# EAGLE board board (EAGLE 9.7.0)
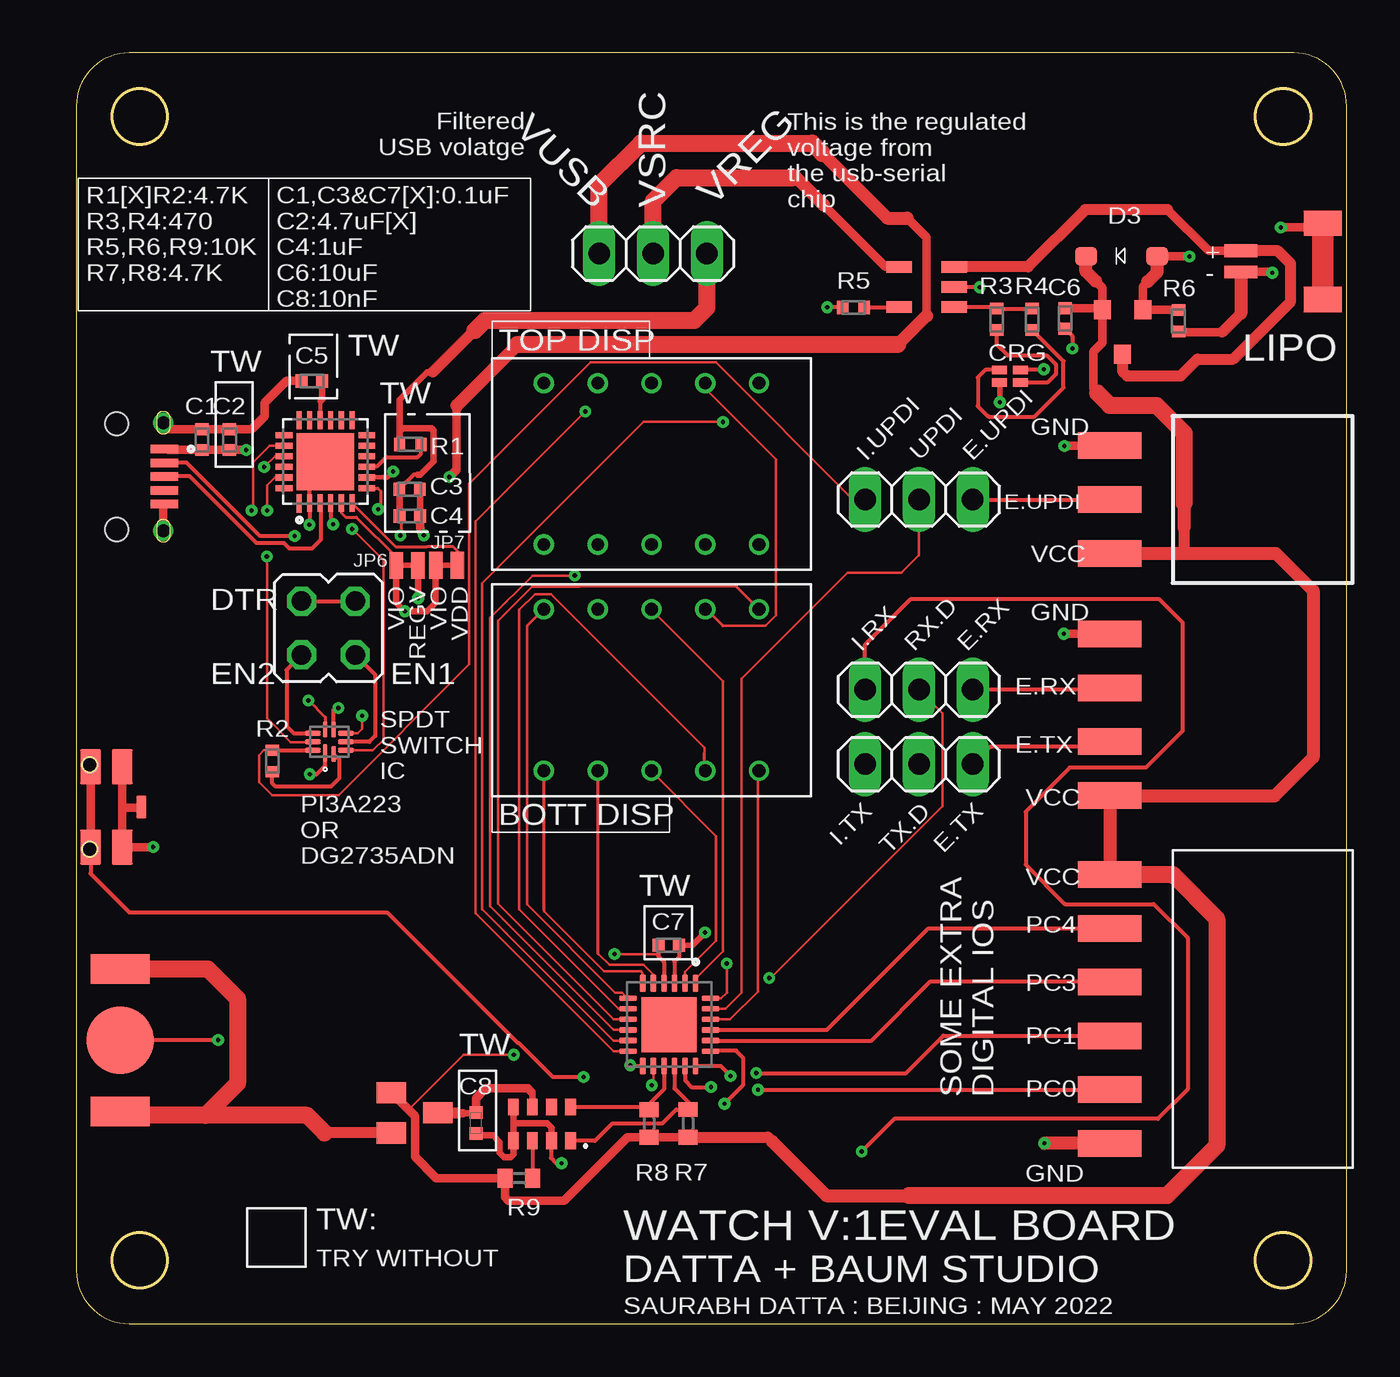
[diagram p0: board, top side]
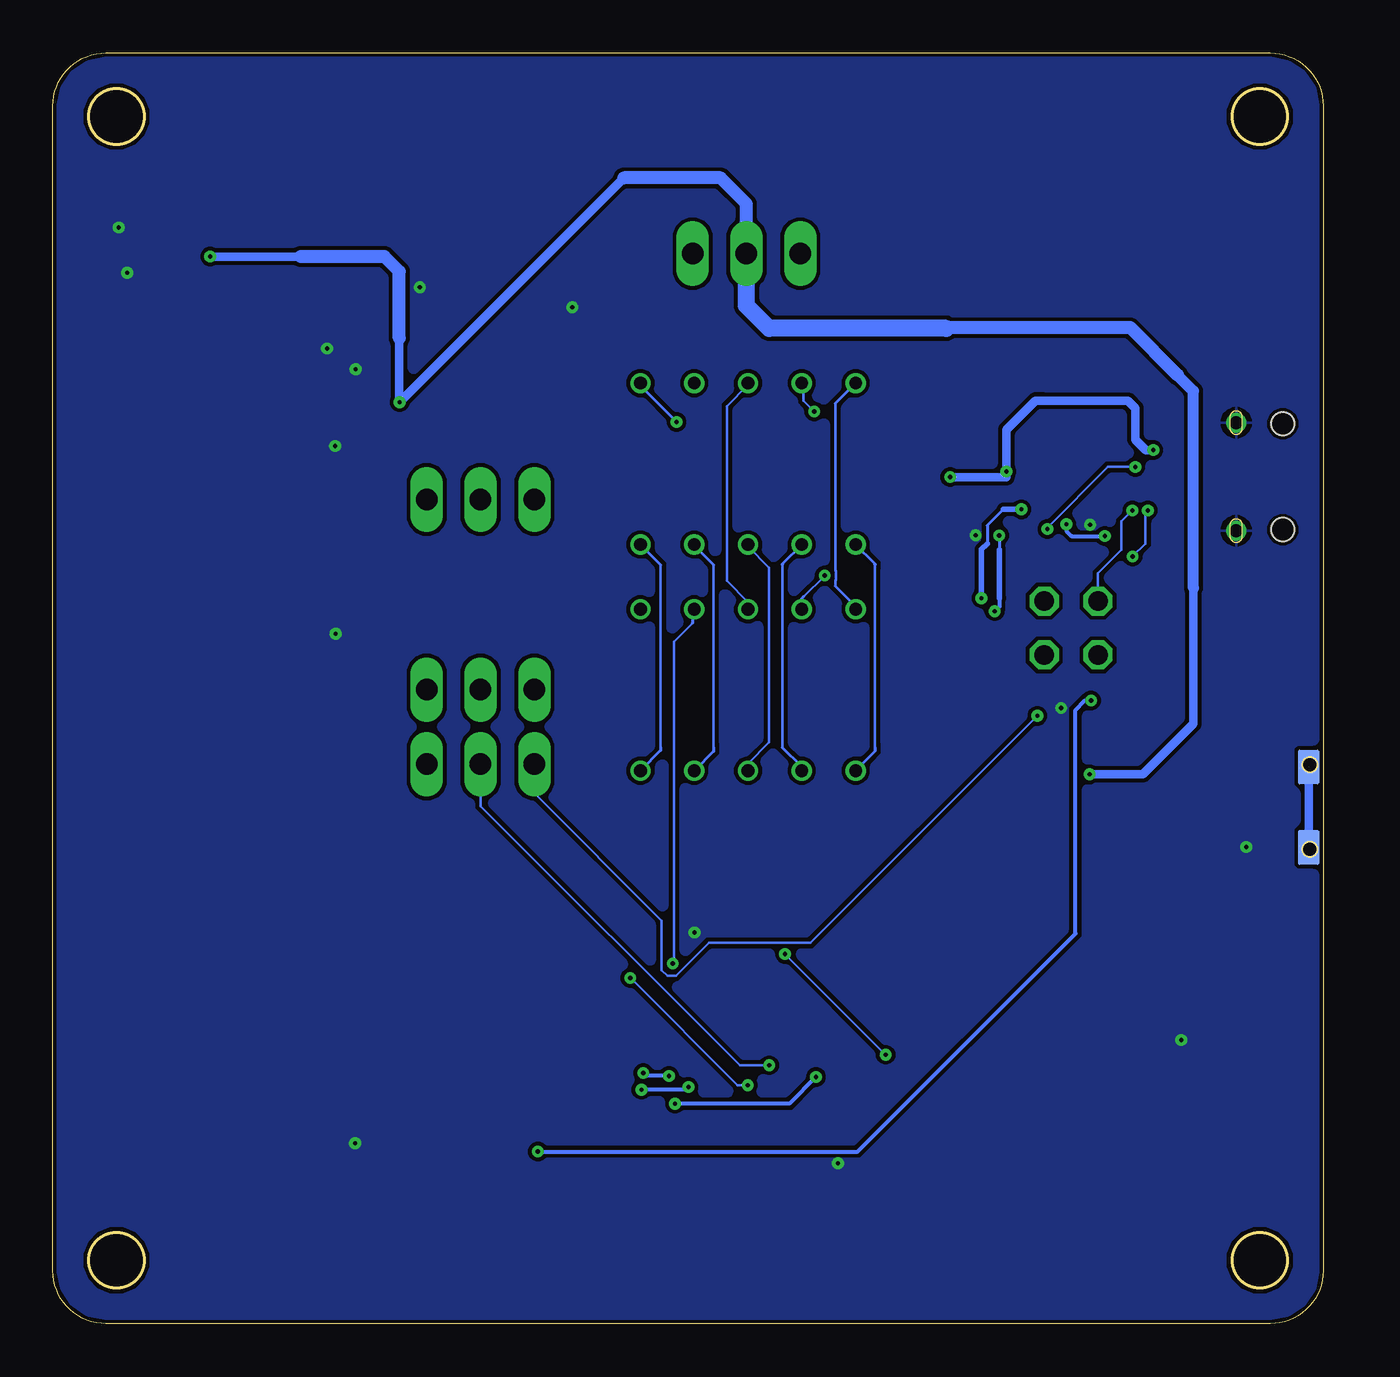
[diagram p1: board, bottom side, seen from below]

Size 60 x 60 mm. Coordinates in mm from the lower left corner, seen from the top.
Outline: 3.81,37.19 3.81,37.69 3.81,37.72 3.82,37.75 3.82,37.77 3.83,37.8 3.84,37.82 3.85,37.84 3.87,37.87 3.88,37.89 3.9,37.91 3.92,37.92 3.94,37.94 3.96,37.95 3.98,37.97 4.01,37.98 4.03,37.98 4.06,37.99 4.08,37.99 4.11,37.99 4.14,37.99 4.16,37.99 4.19,37.98 4.21,37.98 4.24,37.97 4.26,37.95 4.28,37.94 4.3,37.92 4.32,37.91 4.34,37.89 4.36,37.87 4.37,37.84 4.38,37.82 4.39,37.8 4.4,37.77 4.41,37.75 4.41,37.72 4.41,37.69 4.41,37.19 4.41,37.17 4.41,37.14 4.4,37.12 4.39,37.09 4.38,37.07 4.37,37.04 4.36,37.02 4.34,37 4.32,36.98 4.3,36.96 4.28,36.95 4.26,36.93 4.24,36.92 4.21,36.91 4.19,36.9 4.16,36.9 4.14,36.89 4.11,36.89 4.08,36.89 4.06,36.9 4.03,36.9 4.01,36.91 3.98,36.92 3.96,36.93 3.94,36.95 3.92,36.96 3.9,36.98 3.88,37 3.87,37.02 3.85,37.04 3.84,37.07 3.83,37.09 3.82,37.12 3.82,37.14 3.81,37.17 3.81,37.19
Outline: 3.81,42.29 3.81,42.79 3.81,42.82 3.82,42.85 3.82,42.87 3.83,42.9 3.84,42.92 3.85,42.94 3.87,42.97 3.88,42.99 3.9,43.01 3.92,43.02 3.94,43.04 3.96,43.05 3.98,43.07 4.01,43.08 4.03,43.08 4.06,43.09 4.08,43.09 4.11,43.09 4.14,43.09 4.16,43.09 4.19,43.08 4.21,43.08 4.24,43.07 4.26,43.05 4.28,43.04 4.3,43.02 4.32,43.01 4.34,42.99 4.36,42.97 4.37,42.94 4.38,42.92 4.39,42.9 4.4,42.87 4.41,42.85 4.41,42.82 4.41,42.79 4.41,42.29 4.41,42.27 4.41,42.24 4.4,42.22 4.39,42.19 4.38,42.17 4.37,42.14 4.36,42.12 4.34,42.1 4.32,42.08 4.3,42.06 4.28,42.05 4.26,42.03 4.24,42.02 4.21,42.01 4.19,42 4.16,42 4.14,41.99 4.11,41.99 4.08,41.99 4.06,42 4.03,42 4.01,42.01 3.98,42.02 3.96,42.03 3.94,42.05 3.92,42.06 3.9,42.08 3.88,42.1 3.87,42.12 3.85,42.14 3.84,42.17 3.83,42.19 3.82,42.22 3.82,42.24 3.81,42.27 3.81,42.29
Outline: 0,57.5 0,2.5 arc90 2.5,0 57.5,0 arc90 60,2.5 60,57.5 arc90 57.5,60 2.5,60 arc90 0,57.5
Outline: circle at 57,57 radius 1.3
Outline: circle at 3,3 radius 1.3
Outline: circle at 57,3 radius 1.3
Outline: circle at 3,57 radius 1.3
Copper layers (1*16): Top 0.035mm / dielectric 1.5mm / Bottom 0.035mm
Design rules "SparkFun-2-Layer-General-JLCPCB *": minimum track width 0.125mm, minimum drill 0.1mm, track to track 7mil, track to pad 7mil, pad to pad 7mil, via to via 7mil, smd to smd 7mil, copper to edge 7mil, drill to drill 7mil, minimum pad ring 7mil, minimum via ring 7mil, stop-mask expansion 3mil, vias tented up to drill 0.2mm, thermal gap 10mil

## Footprints (pad centres in the part's own frame; a part is rotated, then mirrored left to right if it is on the bottom)
BK-414-TR = smd 1.4 x 2.79: 1+ -3.365,0; 2+ 3.365,0 | smd 3.18 x 3.18: - 0,0
HSMF-C16 = smd 0.7 x 0.4: P$1 -0.5,0.7; P$2 -0.5,0.1; P$3 0.5,0.7; P$4 0.5,0.1
2_DIGIT_0.28 = drill 0.6: _1 -5.08,-3.81; _2 -2.54,-3.81; _3 0,-3.81; _4 2.54,-3.81; _5 5.08,-3.81; _6 5.08,3.81; _7 2.54,3.81; _8 0,3.81; _9 -2.54,3.81; _10 -5.08,3.81
CAPC1005X60 = smd 0.56 x 0.629: 1 -0.485,0; 2 0.485,0
0402-TIGHT = smd 0.6 x 0.6: 1 -0.5,0; 2 0.5,0
SOT23 = smd 1 x 1.4: 1 -0.95,-1.1; 2 0.95,-1.1; 3 0,1.1
SOD-123 = smd 1.02 x 0.86: A 1.68,0; C -1.68,0
1X04_SMD_RA_FEMALE = smd 1.25 x 3: 1 -3.81,7.225; 2 -1.27,7.225; 3 1.27,7.225; 4 3.81,7.225
1X03_SMD_RA_FEMALE = smd 1.25 x 3: 1 -2.54,7.225; 2 0,7.225; 3 2.54,7.225
1X06-SMD-FEMALE = smd 1.25 x 3: 1 6.35,3.425; 2 3.81,3.425; 3 1.27,3.425; 4 -1.27,3.425; 5 -3.81,3.425; 6 -6.35,3.425
2X2PIN_JUMPER = drill 0.914 octagon: 1 -1.27,-1.27; 2 -1.27,1.27; 3 1.27,-1.27; 4 1.27,1.27
1X03 = drill 1.016 long: 1 -2.54,0; 2 0,0; 3 2.54,0
SMT-JUMPER_2_NC_TRACE_NO-SILK = smd 0.635 x 1.27: 1 -0.508,0; 2 0.508,0
RESC1005X40 = smd 0.535 x 0.644: 1 -0.507,0; 2 0.507,0
ADAFRUIT_R0402 = smd 0.7 x 0.9: 1 -0.65,0; 2 0.65,0
QFN50P400X400X80-25N = smd 0.84 x 0.26: 1 -1.97,1.25 | smd 0.82 x 0.26: 2 -1.955,0.75; 3 -1.955,0.25; 4 -1.955,-0.25; 5 -1.955,-0.75; 6 -1.955,-1.25; 13 1.955,-1.25; 14 1.955,-0.75; 15 1.955,-0.25; 16 1.955,0.25; 17 1.955,0.75; 18 1.955,1.25 | smd 0.26 x 0.82: 7 -1.25,-1.955; 8 -0.75,-1.955; 9 -0.25,-1.955; 10 0.25,-1.955; 11 0.75,-1.955; 12 1.25,-1.955; 19 1.25,1.955; 20 0.75,1.955; 21 0.25,1.955; 22 -0.25,1.955; 23 -0.75,1.955; 24 -1.25,1.955 | smd 2.7 x 2.7: 25 0,0
QFN50P400X400X90-25N = smd 0.81 x 0.26: 1 -1.95,1.25; 2 -1.95,0.75; 3 -1.95,0.25; 4 -1.95,-0.25; 5 -1.95,-0.75; 6 -1.95,-1.25; 13 1.95,-1.25; 14 1.95,-0.75; 15 1.95,-0.25; 16 1.95,0.25; 17 1.95,0.75; 18 1.95,1.25 | smd 0.26 x 0.81: 7 -1.25,-1.95; 8 -0.75,-1.95; 9 -0.25,-1.95; 10 0.25,-1.95; 11 0.75,-1.95; 12 1.25,-1.95; 19 1.25,1.95; 20 0.75,1.95; 21 0.25,1.95; 22 -0.25,1.95; 23 -0.75,1.95; 24 -1.25,1.95 | smd 2.6 x 2.6: 25 0,0
RV-3028 = smd 0.5 x 0.8: 1 -1.35,-0.8; 2 -0.45,-0.8; 3 0.45,-0.8; 4 1.35,-0.8; 5 1.35,0.8; 6 0.45,0.8; 7 -0.45,0.8; 8 -1.35,0.8
QFN40P140X180X60-10N = smd 0.22 x 0.74: COM1 -0.4,-0.78; COM2 0,0.78; IN1 0,-0.78; IN2 0.4,0.78; NC1 0.4,-0.78; NO2 -0.4,0.78 | smd 0.74 x 0.22: GND 0.58,-0.2; NC2 0.58,0.2; NO1 -0.58,-0.2 | smd 0.82 x 0.22: VDD -0.53,0.2
PTS840ESDPMSMTRLF = smd 1.65 x 1: 1 -1.9,0.75; 2 1.9,0.75; 3 -1.9,-0.75; 4 1.9,-0.75 | smd 1.1 x 0.5: 5 0,1.65 | smd 1.65 x 1 bottom: B3 -1.89,-0.745; B4 1.91,-0.745 | hole 0.7: -2,-0.8; 2,-0.8
CUI_UJ2-MIBH-4-SMT-TR-67 = smd 1.3 x 0.4: 1 4.25,1.3; 2 4.25,0.65; 3 4.25,0; 4 4.25,-0.65; 5 4.25,-1.3 | drill 0.6: S1 4.2,2.55; S2 4.2,-2.55 | hole 1.1: 2,2.5; 2,-2.5
MCP73831_SOT23-5L = smd 0.55 x 1.2: 1 -0.95,-1.3; 2 0,-1.3; 3 0.95,-1.3; 4 0.95,1.3; 5 -0.95,1.3
DMG341-P_CHANNEL_MOSFET-SOT23 = smd 0.8 x 0.9: 1 -0.95,-1; 2 0.95,-1; 3 0,1.1
JST-SM02B-SRSS-TB = smd 0.6 x 1.55: 1 0.5,0; 2 -0.5,0 | smd 1.2 x 1.8: M1 1.8,3.875; M2 -1.8,3.875

## Placement (x,y rotation side)
1.55V-8MAH  BK-414-TR  [BK-414-TR]  2.08,13.39 90 top
2IN1LED  HSMF-C16  [HSMF-C16]  44.1,44.34 0 top
BOT  0.28-2DIGIT-7SEGEMNT  [2_DIGIT_0.28]  27.17,29.92 0 top
C1  100nF  [CAPC1005X60]  5.94,41.74 90 top
C2  4.7uF  [CAPC1005X60]  7.24,41.74 90 top
C3  0.1uF  [CAPC1005X60]  15.74,39.4 180 top
C4  1uF  [CAPC1005X60]  15.75,38.14 180 top
C5  4.7uF  [CAPC1005X60]  11.13,44.52 180 top
C6  10uF  [CAPC1005X60]  46.71,47.46 270 top
C7  100nF  [CAPC1005X60]  27.98,17.87 0 top
C8  10nF  [0402-TIGHT]  18.88,9.48 270 top
D1  BAS70-05  [SOT23]  15.98,9.95 270 top
D3  MBR0540  [SOD-123]  49.37,50.4 0 top
J1  1x4 RA Female  [1X04_SMD_RA_FEMALE]  56.04,28.75 90 top
J2  1x3 RA Female  [1X03_SMD_RA_FEMALE]  56.04,38.92 90 top
J3  [1X06-SMD-FEMALE]  52.23,14.86 90 top
JP1  2X2PIN_JUMPER  [2X2PIN_JUMPER]  11.91,32.84 180 top
JP2  PINHD-1X3  [1X03]  27.24,50.53 0 top
JP3  PINHD-1X3  [1X03]  39.8,38.92 180 top
JP4  PINHD-1X3  [1X03]  39.8,26.42 180 top
JP5  PINHD-1X3  [1X03]  39.8,29.94 180 top
JP6  JUMPER-SMT_2_NC_TRACE_NO-SILK  [SMT-JUMPER_2_NC_TRACE_NO-SILK]  15.63,35.8 0 top
JP7  JUMPER-SMT_2_NC_TRACE_NO-SILK  [SMT-JUMPER_2_NC_TRACE_NO-SILK]  17.49,35.81 180 top
R1  4.7K  [RESC1005X40]  15.78,41.52 0 top
R2  4.7K  [RESC1005X40]  9.26,26.56 270 top
R3  470  [RESC1005X40]  43.46,47.42 90 top
R4  470  [RESC1005X40]  45.15,47.42 90 top
R5  10K  [RESC1005X40]  36.7,47.99 180 top
R6  10K  [RESC1005X40]  52.06,47.36 90 top
R7  4.7K  [ADAFRUIT_R0402]  28.9,9.46 90 top
R8  4.7K  [ADAFRUIT_R0402]  27.06,9.46 90 top
R9  4.7K  [ADAFRUIT_R0402]  20.91,6.88 0 top
TOP  0.28-2DIGIT-7SEGEMNT  [2_DIGIT_0.28]  27.17,40.6 0 top
U2  CP2104-F03-GM  [QFN50P400X400X80-25N]  11.77,40.71 90 top
U3  ATTINY1607-MFR  [QFN50P400X400X90-25N]  28,14.12 270 top
U4  RV-8803  [RV-3028]  22,9.43 180 top
U$1  PI3A223  [QFN40P140X180X60-10N]  11.96,27.47 90 top
U$2  PTS840ESDPMSMTRLF  [PTS840ESDPMSMTRLF]  1.43,24.4 270 top
U$8  VERTICAL_MICRO_USBCUI_HOR_T4  [CUI_UJ2-MIBH-4-SMT-TR-67]  -0.09,39.99 0 top
U$10  MCP  [MCP73831_SOT23-5L]  40.17,48.95 90 top
U$11  DMG341  [DMG341-P_CHANNEL_MOSFET-SOT23]  49.42,46.88 180 top
X2  JST_SM02B-SRSS-TB  [JST-SM02B-SRSS-TB]  55,50.16 270 top

## Library data of the parts
1.55V-8MAH BOT TOP U$1 U$2 U$8 U$10 U$11 X2 = MY_CLOCK_LIB_COMPONENTS
2IN1LED JP1 = MY_CONNECTORS
C1-C7 = MY_CAP_LIB; CATEGORY: Capacitor
C8 = SparkFun-Capacitors; PROD_ID: CAP-14847
D1 = BAS_40_05
D3 = Diodes; CREATED_BY: PCBLayout.com; DIGIKEY_PART_NUMBER: MBR0520LT1GOSTR-ND; MANUFACTURER: ON Semiconductor; MPN: MBR0520LT1G; PACKAGE: SOD-123
J1 = MY_CLOCK_LIB_COMPONENTS; PROD_ID: CONN-12382
J2 = SparkFun-Connectors; PROD_ID: CONN-10926
J3 = SparkFun-Connectors; PROD_ID: CONN-09668
JP2-JP5 = Connector; CATEGORY: CONNECTOR; SUB-CATEGORY: PIN-HEADER
JP6 JP7 = SparkFun-Jumpers
R1-R6 = resistor; CATEGORY: Resistor; SUB-CATEGORY: Fixed
R7-R9 = ARDUINO_3V_TTL_INTERFACE_2_PI
U2 = CP2104-F03-GM; MANUFACTURER: Silicon Labs; PARTREV: 1.2; STANDARD: IPC7351B
U3 = ATTINY1607-MNR; AVAILABILITY: In Stock; DESCRIPTION: AVR AVR® ATtiny, Functional Safety (FuSa) Microcontroller IC 8-Bit 20MHz 16KB (16K x 8) FLASH 24-VQFN (4x4); MF: Microchip Technology; MP: ATTINY1607-MNR; PACKAGE: VFQFN-24 Microchip Technology; PRICE: None
U4 = RV-8803; PROD_ID: IC-14828

## Nets
!INT: R9.2 U4.6
!RST: R1.2 U2.9
CHARGER_PROG: R5.1 U$10.5
CHARGER_STAT: R3.2 R4.2 U$10.1
COMM1: TOP._9 U3.12
COMM2: TOP._6 U3.11
COMM3: BOT._9 U3.10
COMM4: BOT._6 U3.9
DOT: BOT._5 TOP._5 U3.22
DTR: JP1.1 JP1.3 U2.23
GND: 1.55V-8MAH.- 2IN1LED.P$3 C1.2 C2.2 C3.1 C4.1 C5.2 C6.2 C7.2 C8.2 J1.4 J2.3 J3.6 R5.2 R6.1 U2.2 U2.25 U3.3 U4.4 U4.5 U4.7 U$1.GND U$2.1 U$2.2 U$2.5 U$8.5 U$8.S1 U$8.S2 U$10.2 X2.1 X2.M1 X2.M2
IN1: JP1.2 U$1.IN1
IN2: JP1.4 U$1.IN2
LEDG_A: 2IN1LED.P$1 R4.1
LEDY_K: 2IN1LED.P$4 R3.1
NO1: R2.2 U$1.NO1
PC0: J3.5 U3.17
PC1: J3.4 U3.18
PC3: J3.3 U3.20
PC4: J3.2 U3.21
REGIN: JP6.2 U2.7
RX: JP5.2 U3.14
RX_AS: JP5.3 U$1.NC2
RX_CP: U2.20 U$1.COM2
RX_EXT: J1.3 JP5.1
SCL: R7.2 U3.16 U4.8
SDA: R8.2 U3.15 U4.1
SEG_A: BOT._7 TOP._7 U3.24
SEG_B: BOT._8 TOP._8 U3.1
SEG_C: BOT._3 TOP._3 U3.2
SEG_D: BOT._2 TOP._2 U3.5
SEG_E: BOT._1 TOP._1 U3.6
SEG_F: BOT._10 TOP._10 U3.7
SEG_G: BOT._4 TOP._4 U3.8
SW1: U3.19 U$2.3 U$2.4 U$2.B3 U$2.B4
TX: JP4.2 U3.13
TX_AS: JP4.3 U$1.NC1
TX_CP: U2.21 U$1.COM1
TX_EXT: J1.2 JP4.1
UPDI: JP3.2 U3.23
UPDI_EXT: J2.2 JP3.1
UPDI_INT: JP3.3 R2.1 U$1.NO2
USB_N: U2.4 U$8.2
USB_P: U2.3 U$8.3
V_LIPO: U$10.3 U$11.3 X2.2
V_USB: 2IN1LED.P$2 D3.A JP2.2 R6.2 U$1.VDD U$10.4 U$11.1
VBATT: 1.55V-8MAH.1+ 1.55V-8MAH.2+ D1.2
VBUS: C1.1 C2.1 JP2.1 U2.8 U$8.1
VCC: C6.1 C7.1 D1.1 D3.C J1.1 J2.1 J3.1 R7.1 R8.1 R9.1 U3.4 U$11.2
VDD: JP7.1 U2.6
VDD1: C8.1 D1.3 U4.3
VIO: C3.2 C4.2 JP2.3 JP6.1 JP7.2 R1.1 U2.5
VPP: C5.1 U2.16

## Tracks (layer width: path | path; a pad name or v marks a point on that pad's centre or on a via)
!INT
  Top 0.2: U4.6 21.55,6.88 R9.2
!RST
  Top 0.2: U2.9 13.73,40.46 14.19,40.46 14.64,40.92 16.12,40.92 16.29,41.08 R1.2
CHARGER_PROG
  Top 0.178: R5.1 38.86,47.99 U$10.5
CHARGER_STAT
  Top 0.178: R4.2 R3.2 43.39,48 U$10.1
COMM1  (via drill 0.2)
  Top 0.125: U3.12 25.37,12.87 18.86,19.38 18.86,37.89 v24.04,43.08
  Bottom 0.125: v24.04,43.08 24.54,43.58 24.54,44.33 TOP._9
COMM2  (via drill 0.2)
  Top 0.125: v30.54,42.58 26.79,42.58 19.17,34.95 19.17,19.57 25.37,13.37 U3.11
  Bottom 0.15: TOP._6 32.25,44.28 v30.54,42.58
COMM3  (via drill 0.2)
  Top 0.125: v23.54,35.33 21.54,35.33 19.54,33.33 19.54,19.7 25.37,13.87 U3.10
  Bottom 0.125: v23.54,35.33 24.54,34.33
  Bottom 0.15: 24.54,34.33 24.63,34.24 BOT._9
COMM4
  Top 0.125: U3.9 25.37,14.37 19.92,19.82 19.92,33.2 21.52,34.81 23.76,34.81 23.77,34.83 31.17,34.83
  Top 0.15: 31.17,34.83 32.25,33.75 BOT._6
DOT
  Top 0.125: U3.22 30.89,14.37 32.2,15.68 32.2,15.79
  Top 0.127: 32.2,26.06 32.2,15.79
  Top 0.15: BOT._5 32.2,26.06
  Bottom 0.125: 31.29,35.83 31.29,27.2
  Bottom 0.15: 31.29,27.2 31.29,27.06 BOT._5 | TOP._5 31.29,35.83
DTR  (via drill 0.2)
  Top 0.125: v9.02,38.4 9.02,39.59 9.38,39.96 U2.23
  Top 0.178: JP1.3 JP1.1
  Bottom 0.125: JP1.3 10.64,35.42 9.52,36.54 9.52,37.89 v9.02,38.4
GND  (via drill 0.2)
  Top 0.178: C7.2 28.47,17.31 28.25,17.1 U3.3
  Top 0.2: U2.25 11.02,39.96 U2.2 11.02,37.74 v11.01,37.73 | U4.7 22.42,8.63 22.42,7.83 22.67,7.58 v22.91,7.58 v22.92,7.57 | 1.55V-8MAH.- v6.71,13.4 | U$1.GND 12.15,28.97 12.26,29.07 v12.38,29.07 | v42.67,48.94 41.48,48.94 U$10.2 | R5.2 v35.47,47.99 | C6.2 47.04,46.64 v47.04,46.05 | v45.71,45.06 45.68,45.04 2IN1LED.P$3
  Top 0.254: C7.2 29.1,17.87 v29.7,18.47
  Top 0.305: 20.65,9.46 U4.5 20.65,7.99 20.52,7.86 20.22,7.86 20,8.07 20,8.56 19.68,8.89 18.97,8.89 C8.2 | 20.65,9.46 U4.4 | 20.65,9.46 22.23,9.46 22.45,9.25 U4.7 | C3.1 C4.1 | 3.08,24.55 U$2.5
  Top 0.406: 54.13,46.82 52.08,46.82 R6.1 | C2.2 C1.2 4.11,42.23 U$8.S1 | C2.2 | C2.2 8.28,42.23 8.9,42.85 8.9,43.48 9.95,44.52 C5.2 | X2.M2 58.67,51.76 v56.89,51.76 | J2.3 46.68,41.46 v46.67,41.44 | J1.4 46.65,32.56 v46.64,32.58 | X2.1 56.45,49.66 v56.49,49.62 | U$8.S2 4.11,38.64 U$8.5 | v3.63,22.51 v3.63,22.5 U$2.2 2.18,24.36 | U$2.1 2.18,24.36 | U$2.5 3.08,24.36 2.18,24.36 | C4.1 16.23,37.59 16.26,37.57 16.26,37.39 v16.41,37.23
  Top 0.508: 55,47.69 54.13,46.82
  Top 0.61: X2.1 55,47.69 | J3.6 45.73,8.51 v45.73,8.53
  Top 1.016: X2.M1 X2.M2
  pour Bottom: -1.58,62.95 63.18,62.95 63.18,-2.85 -1.58,-4.2
IN1
  Top 0.178: JP1.2 14.12,30.64 14.12,27.75 13.84,27.47 U$1.IN1
IN2
  Top 0.178: JP1.4 9.93,30.86 9.93,28.21 10.27,27.88 U$1.IN2
LEDG_A
  Top 0.178: 2IN1LED.P$1 42.93,45.04 42.58,44.69 42.58,43.33 43.09,42.82 45.26,42.82 46.63,44.19 46.63,45.45 45.16,46.91 R4.1
LEDY_K
  Top 0.2: R3.1 43.46,46.25 44,45.72 45.84,45.72 46.26,45.29 46.26,44.83 45.87,44.44 2IN1LED.P$4
NO1
  Top 0.178: R2.2 9.26,25.52 9.42,25.36 12.02,25.36 12.42,25.76 12.42,26.63 U$1.NO1
PC0  (via drill 0.2)
  Top 0.2: U3.17 28.75,11.49 29.07,11.18 v29.98,11.18 | v32.2,11.05 J3.5
  Bottom 0.2: v29.98,11.18 30.1,11.05 v32.2,11.05
PC1  (via drill 0.2)
  Top 0.2: U3.18 30.44,12.17 v30.91,11.7 | J3.4 48.8,13.6 40.95,13.6 39.19,11.83 v32.12,11.83
  Bottom 0.2: v30.91,11.7 31.98,11.7 v32.12,11.83
PC3
  Top 0.2: U3.20 37.56,13.37 40.35,16.16 48.77,16.16 J3.3
PC4
  Top 0.2: U3.21 35.45,13.87 40.25,18.67 J3.2
REGIN  (via drill 0.2)
  Top 0.15: U2.7 14.24,39.46 14.38,39.31 14.38,38.58 v14.26,38.45 | v16.14,34.25 v16.14,34.26
  Top 0.305: v16.14,34.26 JP6.2
  Bottom 0.15: 15.11,38.45 15.87,37.69 15.87,36.84
  Bottom 0.254: v16.14,34.25 16.14,36.56 15.87,36.84 | v14.26,38.45 15.11,38.45
RX  (via drill 0.2)
  Top 0.125: v32.73,16.32 32.8,16.32 40.92,24.44 40.92,28.82 JP5.2 | U3.14 27.25,11.34 v27.18,11.26
  Bottom 0.125: v27.18,11.26 27.67,11.26 v32.73,16.32
RX_AS  (via drill 0.2)
  Top 0.15: U$1.NC2 11.76,28.64 v10.97,29.43
  Top 0.2: JP5.3 37.26,32.06 39.43,34.23 51.13,34.23 52.24,33.11 52.24,27.97 50.52,26.25 46.93,26.25 44.84,24.16 44.84,21.68 46.7,19.81 50.89,19.81 52.49,18.21 52.49,11.07 51.09,9.68 38.64,9.68 v37.09,8.12
  Bottom 0.2: v37.09,8.12 21.99,8.12 11.71,18.41 11.71,28.97 11.26,29.43 v10.97,29.43
RX_CP  (via drill 0.2)
  Top 0.125: v9.01,36.23 9.01,28.57 10.13,27.45 11.15,27.45 U$1.COM2 | U2.20 9.13,41.46 8.36,40.68 8.36,38.48 v8.28,38.4
  Bottom 0.125: v9.01,36.23 8.39,36.84 8.39,38.29 v8.28,38.4
RX_EXT
  Top 0.2: J1.3 48.73,29.93 JP5.1
SCL
  Top 0.178: U3.16 28.25,11.11 28.9,10.47 R7.2
  Top 0.2: U4.8 24.5,8.63 25.33,9.46 27.68,9.46 28.33,10.11 R7.2
SDA
  Top 0.178: R8.2 27.06,10.37 27.75,11.07 U3.15
  Top 0.2: U4.1 26.93,10.23 R8.2
SEG_A  (via drill 0.2)
  Top 0.125: 30.54,32.95 32.54,32.95 33.04,33.45 33.04,40.83 29.79,44.08 29.79,44.33 TOP._7 | U3.24 30.46,15.37 30.73,15.64 30.73,16.89 30.72,16.89 v30.72,17.01
  Top 0.15: BOT._7 29.76,33.73 30.54,32.95
  Bottom 0.125: 29.79,33.08 30.67,32.2 30.67,17.07 v30.72,17.01
  Bottom 0.15: BOT._7 29.79,33.65 29.79,33.08
SEG_B
  Top 0.125: BOT._8 27.17,33.7 30.54,30.32 30.54,17.57 29.25,16.29 U3.1
  Bottom 0.125: BOT._8 27.17,34.08 28.17,35.08 28.17,43.33 27.17,44.33 TOP._8
SEG_C
  Top 0.125: BOT._3 27.17,26.07 30.22,23.02 30.22,18.09 28.75,16.62 U3.2
  Bottom 0.125: BOT._3 27.17,26.45 26.17,27.45 26.17,35.7 27.17,36.7 TOP._3
SEG_D
  Top 0.125: U3.5 27.25,16.49 26.8,16.94 25.18,16.94 24.67,17.45
  Top 0.15: BOT._2 24.63,17.49 24.67,17.45
  Bottom 0.125: 25.54,27.2 25.54,35.83
  Bottom 0.15: BOT._2 24.63,26.29 25.54,27.2 | TOP._2 25.54,35.88 25.54,35.83
SEG_E
  Top 0.125: U3.6 26.75,16.55 26.67,16.64 24.92,16.64 22.09,19.47 22.09,19.53
  Top 0.15: 22.09,19.53 BOT._1
  Bottom 0.125: 21.17,27.2 21.17,35.83
  Bottom 0.15: 21.17,27.2 21.17,27.03 BOT._1 | 21.17,35.83 21.17,35.87 TOP._1
SEG_F
  Top 0.125: 21.29,32.95 21.29,19.8 25.45,15.64 25.79,15.64 U3.7
  Top 0.15: 21.29,32.95 22.07,33.73 BOT._10
  Bottom 0.125: 23.04,34.83 23.04,35.09 23.02,35.11 23.02,35.54 23.04,35.56 23.04,43.45
  Bottom 0.15: BOT._10 22.09,33.87 23.04,34.83 | TOP._10 23.04,43.46 23.04,43.45
SEG_G
  Top 0.125: 29.67,26.94 29.67,27.2 22.42,34.45 21.67,34.45 20.92,33.7 20.92,19.57 25.62,14.87 U3.8
  Top 0.15: 29.67,26.94 29.67,26.15 BOT._4
  Bottom 0.125: 28.79,35.83 28.79,27.2
  Bottom 0.15: 28.79,27.2 28.79,27.02 BOT._4 | TOP._4 29.71,36.74 28.79,35.83
SW1  (via drill 0.2)  (1 unrouted)
  Top 0.2: U3.19 29.97,12.89 31.17,12.89 31.51,12.54 31.51,11.28 v30.62,10.39 | U$2.4 0.68,21.25 2.5,19.43 14.68,19.43 20.85,13.26 20.9,13.26 22.5,11.65 v23.95,11.65
  Top 0.406: U$2.3 U$2.4
  Bottom 0.2: v23.95,11.65 25.22,10.39 v30.62,10.39
  Bottom 0.406: U$2.B3 U$2.B4
TX  (via drill 0.2)
  Top 0.125: v26.17,12.2 26.72,12.2 U3.13
  Bottom 0.125: v26.17,12.2 27.56,12.2 39.8,24.44 JP4.2
TX_AS  (via drill 0.2)
  Top 0.125: v13.51,28.7 13.51,28.09 13.29,27.88 U$1.NC1
  Bottom 0.125: JP4.3 37.26,25.04 31.24,19.02 31.24,16.69 30.98,16.43 30.57,16.43 29.02,17.98 24.23,17.98 v13.51,28.7
TX_CP  (via drill 0.2)
  Top 0.125: U$1.COM1 14.01,27.07 14.51,27.57 14.51,36.05 v13.03,37.52 | v8.88,40.45 9.38,40.96 U2.21
  Bottom 0.125: v8.88,40.45 10.16,40.45 13.03,37.58 v13.03,37.52
TX_EXT
  Top 0.2: JP4.1 43.16,27.23 48.57,27.23 J1.2
UPDI
  Top 0.125: U3.23 30.66,14.87 31.42,15.62 31.42,30.45 36.42,35.45 38.97,35.45 39.8,36.29 JP3.2
UPDI_EXT
  Top 0.2: JP3.1 J2.2
UPDI_INT
  Top 0.125: R2.1 8.85,27.07 8.63,26.85 8.63,25.57 9.26,24.95 12.38,24.95 18.56,31.13 18.56,39.65 24.29,45.39 30.2,45.39 36.68,38.92 JP3.3
  Top 0.178: R2.1 U$1.NO2
USB_N  (via drill 0.2)
  Top 0.178: v10.32,37.19 10.29,37.21 8.66,37.21 5.2,40.67 4.16,40.67 U$8.2 | U2.4 12.02,38.06 12.13,37.95 v12.13,37.75
  Bottom 0.178: v12.13,37.75 12.13,37.43 11.89,37.18 v10.32,37.18 v10.32,37.19
USB_P
  Top 0.178: U2.3 11.55,38.72 11.55,37.02 11.12,36.59 10.07,36.59 9.81,36.86 8.51,36.86 5.35,40.02 4.16,40.02 U$8.3
V_LIPO
  Top 0.406: 51.54,52.6 53.48,50.66 X2.2
  Top 0.508: U$11.3 49.42,44.98 49.64,44.75 52.17,44.75 52.95,45.54 54.64,45.54 57.36,48.26 57.36,50.05 56.76,50.66 X2.2 | U$10.3 44.95,49.9 47.66,52.6 51.54,52.6
V_USB  (via drill 0.2)
  Top 0.2: U$1.VDD 11.76,26.35 11.34,25.94 v11.03,25.94
  Top 0.254: 2IN1LED.P$2 43.62,44.41 v43.62,43.51
  Top 0.406: 50.6,49.2 50.37,48.96 U$11.1 52.05,47.88 R6.2 | 35.3,52.81 38.22,49.9 U$10.4 | D3.A 52.55,50.4 v52.57,50.39
  Top 0.61: D3.A 51.05,49.65 50.6,49.2 | 33.88,54.11 34,54.11 35.3,52.81
  Top 0.813: JP2.2 27.24,53 28.35,54.11 33.88,54.11
  Bottom 0.406: 33.03,54.1 v43.62,43.51 43.64,43.52 43.64,46.54 | 48.29,50.39 v52.57,50.39 | v11.03,25.94 8.53,25.94 6.13,28.34 6.13,34.73
  Bottom 0.508: 6.13,34.73 6.13,44.04 6.88,44.79
  Bottom 0.61: 33.03,54.1 28.47,54.1 27.24,52.88 JP2.2 | 48.29,50.39 44.34,50.39 43.64,49.69 43.64,46.54 | 6.88,44.79 9.12,47.03 17.78,47.03 17.8,47
  Bottom 0.813: 17.8,47 26.17,47 27.24,48.08 JP2.2
VBATT
  Top 0.508: D1.2 14.87,9.01 11.73,9.01
  Top 0.813: 1.55V-8MAH.2+ 6.22,16.75 7.62,15.35 7.62,11.35 6.11,9.84 | 6.11,9.84 10.9,9.84 11.73,9.01 | 6.11,9.84 2.26,9.84 1.55V-8MAH.1+
VBUS  (via drill 0.2)
  Top 0.203: U2.8 14.68,39.96 14.69,39.94 14.99,40.24 v14.97,40.24
  Top 0.406: v8.03,41.25 v8.03,41.26 C2.1 C1.1 4.35,41.26 4.31,41.29 U$8.1 | 39.25,52.2 40.16,51.3 40.16,47.59 | 17.97,43.35 17.97,40.33 v17.62,39.98
  Top 0.61: 35.24,55.26 38.3,52.2 39.25,52.2 | 40.16,47.59 38.79,46.23 | 20.84,46.23 17.97,43.35
  Top 0.813: JP2.1 24.7,53.77 26.67,55.74 34.77,55.74 35.24,55.26 | 38.79,46.23 20.84,46.23
  Bottom 0.406: v8.03,41.25 8.38,41.25 8.87,41.74 8.87,43.23 9.22,43.58 13.27,43.58 13.28,43.59 13.59,43.59 14.97,42.21 v14.97,40.24 14.97,39.96 17.6,39.96 v17.62,39.98
VCC  (via drill 0.2)
  Top 0.125: v20.67,12.7 18.29,12.7 15.69,10.09 | v25.42,17.46 v25.43,17.45 27.5,17.45
  Top 0.178: C7.1 27.5,17.45 27.5,17.34 27.75,17.09 U3.4
  Top 0.406: R7.1 R8.1 26.03,8.8 23.04,5.81 20.4,5.81 20.26,5.96 R9.1 17,6.88 16,7.88 16,9.78 15.69,10.09 D1.1 | 48.16,49.23 48.47,48.91 U$11.2 | C6.1 48.4,47.94 U$11.2 | U$11.2 48.47,46.31 48.04,45.89 48.04,44.14 48.23,43.95
  Top 0.508: 52.32,37.59 52.32,36.4 52.29,36.38 | R7.1 32.67,8.81 32.87,8.61
  Top 0.61: D3.C 47.69,49.69 48.16,49.23 | J2.1 52.29,36.38 56.66,36.38 58.42,34.61 58.42,26.74 56.59,24.91 48.85,24.91 J1.1 J3.1 | 52.32,38.75 52.32,37.59 | 32.87,8.61 35.43,6.05 39.34,6.05
  Top 0.813: 48.23,43.95 48.82,43.36 51.02,43.36 52.32,42.06 52.32,38.75 | J3.1 51.78,21.21 53.87,19.12 53.87,8.4 51.52,6.05 39.34,6.05
  Bottom 0.125: v20.67,12.7 v25.42,17.45 v25.42,17.46
VDD
  Top 0.15: JP7.1 18,36.48 17.78,36.7 16.59,36.7 16.58,36.69 15.08,36.69 U2.6
VDD1
  Top 0.305: 18.27,9.94 18.84,9.94 C8.1 | 21.5,10.94 21.55,10.89 U4.3
  Top 0.406: 17.94,9.94 18.27,9.94 | C8.1 18.88,10.65 19.34,11.11 21.33,11.11 21.5,10.94
  Top 0.508: D1.3 17.93,9.95 17.94,9.94
VIO  (via drill 0.2)
  Top 0.15: U2.5 12.52,38.29 12.72,38.09 13.22,38.09 15.12,36.18 JP6.1 | C4.2 15.34,38.06 15.34,37.26 v15.3,37.22
  Top 0.2: 16.11,40.09 15.94,40.09 C3.2
  Top 0.305: C3.2 C4.2 | R1.1 15.27,42.1 | 15.27,42.1 15.44,42.28 16.78,42.28 16.88,42.17 16.88,40.73 16.24,40.09 16.11,40.09 | 15.27,42.1 15.27,43.62 16.58,44.93 16.83,44.93 | JP6.1 15.11,35.79 15.11,34.05 v15.52,33.64 16.57,33.64 16.97,34.04 JP7.2
  Top 0.508: 16.83,44.93 18.8,46.9 18.83,46.9
  Top 0.813: JP2.3 29.78,47.97 29.19,47.38 19.3,47.38 18.83,46.9
  Bottom 0.15: v15.52,33.64 15.53,33.62 | v15.3,37.22 15.3,36.54
  Bottom 0.178: 15.29,34.25 15.29,33.86 v15.52,33.64
  Bottom 0.254: 15.3,36.54 15.3,34.26 15.29,34.25
VPP
  Top 0.2: 11.54,43.56 11.52,43.54 U2.16
  Top 0.305: C5.1 11.62,43.64 11.54,43.56

## Text on the board
tPlace: Filtered / USB volatge | R1[X]R2:4.7K / R3,R4:470 / R5,R6,R9:10K / R7,R8:4.7K | C1,C3&C7[X]:0.1uF / C2:4.7uF[X] / C4:1uF / C6:10uF / C8:10nF | VUSB | VSRC | VREG | This is the regulated / voltage from / the usb-serial / chip | + | - | TOP DISP | TW | CRG | LIPO | TW | TW | GND | I.UPDI | UPDI | E.UPDI | E.UPDI | VCC | VIO | REGV | VIO | VDD | DTR | GND | I.RX | RX.D | E.RX | EN2 | EN1 | E.RX | E.TX | SPDT / SWITCH / IC | I.TX | TX.D | E.TX | VCC | BOTT DISP | PI3A223 / OR / DG2735ADN | TW | VCC | PC4 | PC3 | PC1 | TW | SOME EXTRA / DIGITAL IOS | PC0 | GND | TW: | WATCH V:1 | EVAL BOARD | TRY WITHOUT | DATTA + BAUM STUDIO | SAURABH DATTA : BEIJING : MAY 2022